# EAGLE board Lumix_driver_2 (EAGLE 5.11)
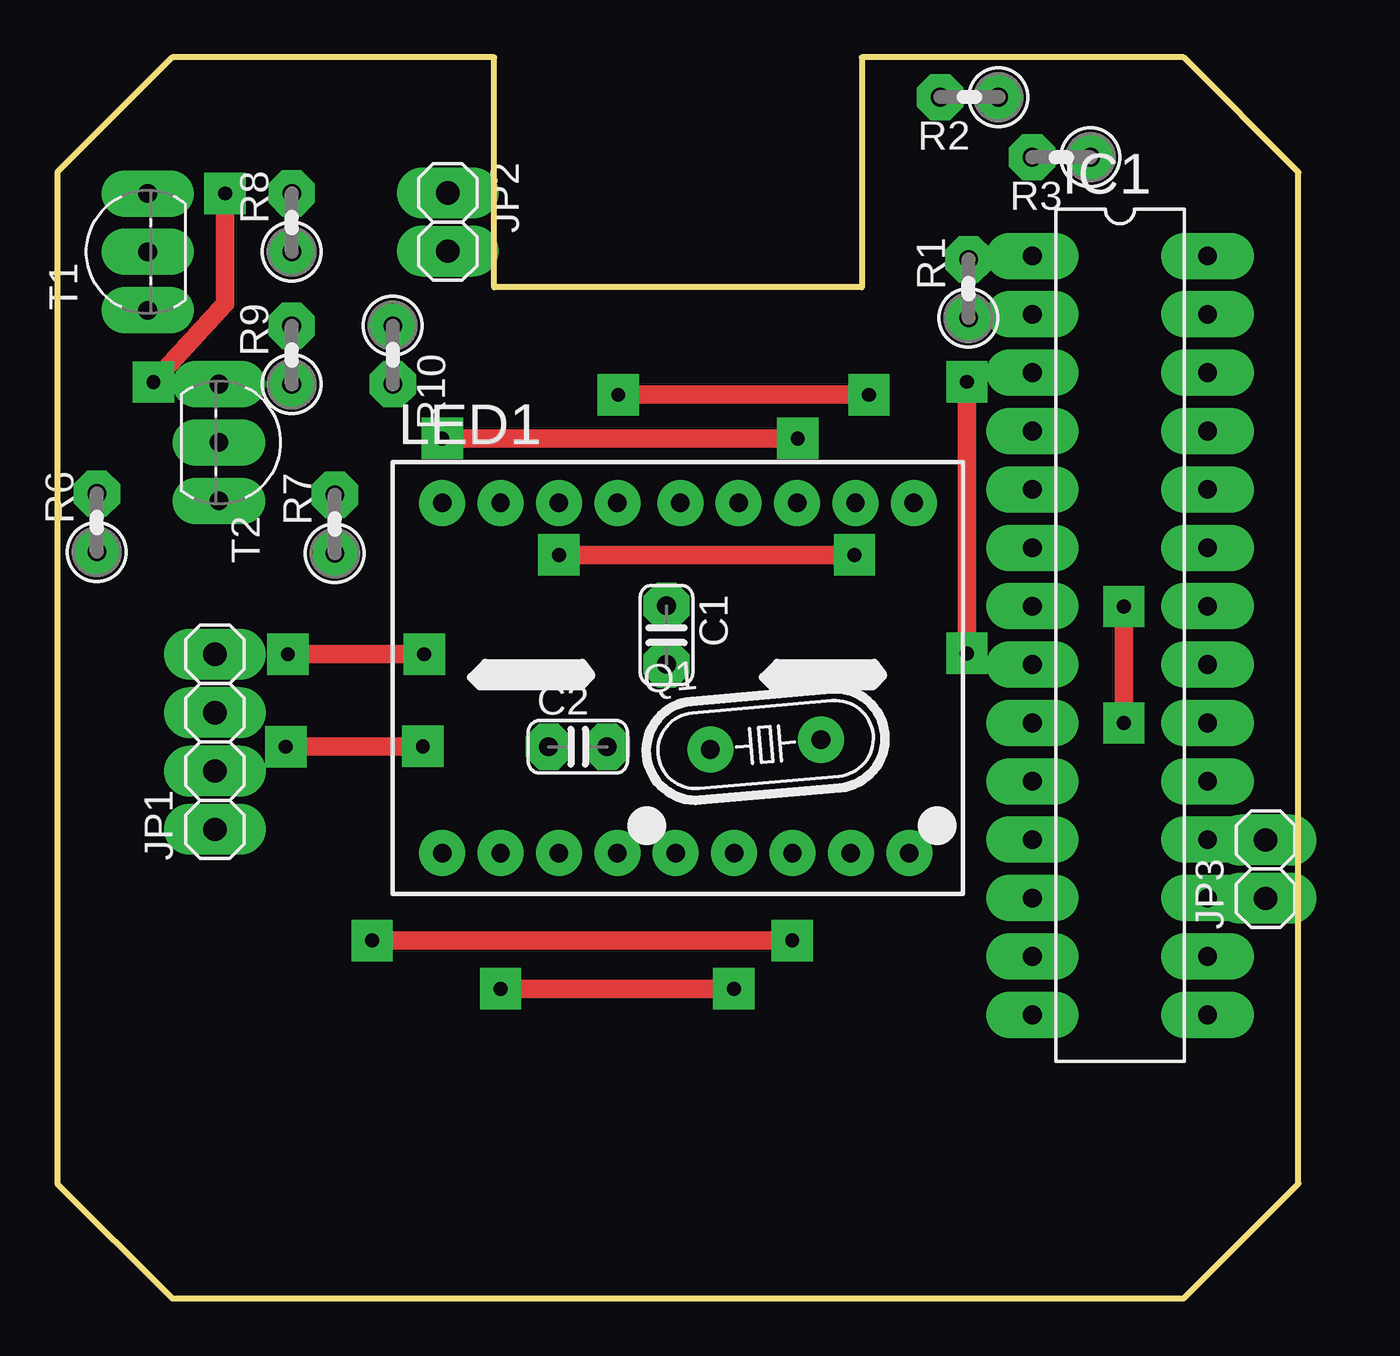
[diagram p0: board, top side]
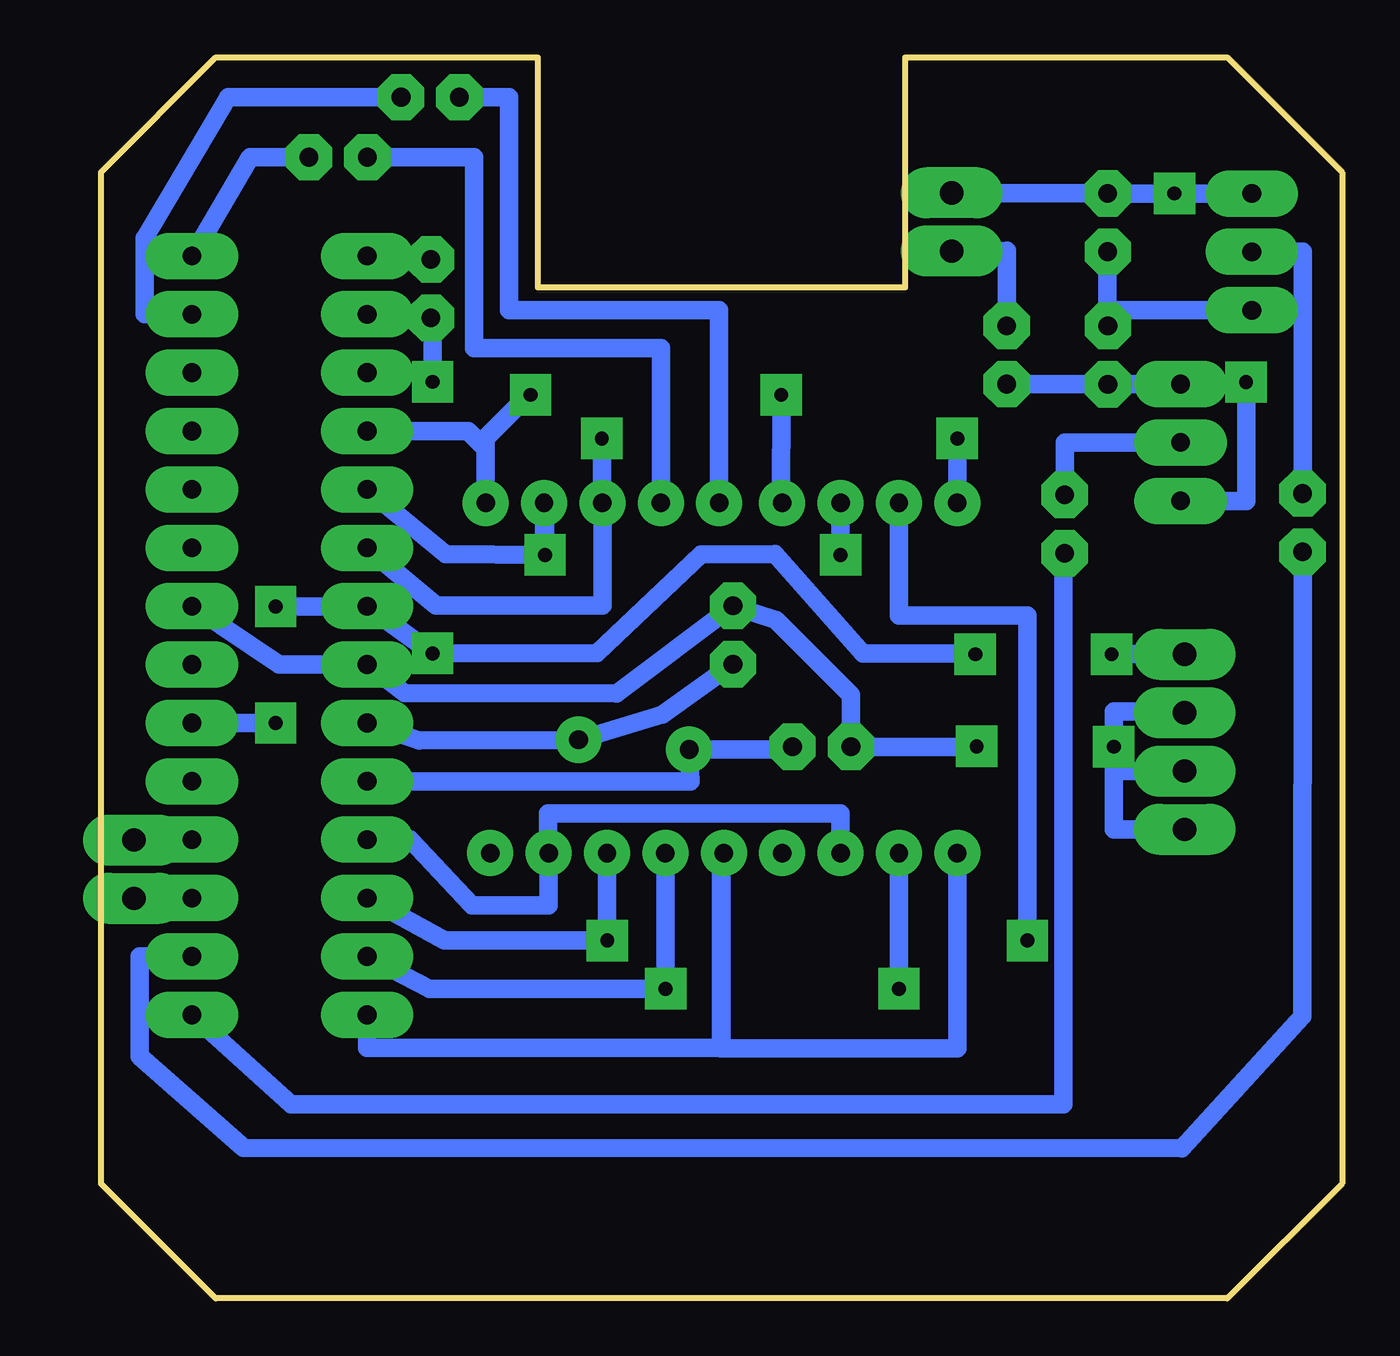
[diagram p1: board, bottom side, seen from below]

Size 54 x 54 mm. Coordinates in mm from the lower left corner, seen from the top.
Outline: 5,0 49,0 54,5 54,49 49,54 35,54 35,44 19,44 19,54 5,54 0,49 0,5 5,0
Copper layers (1*16): Top 0.035mm / dielectric 1.5mm / Bottom 0.035mm
Design rules "hobby": minimum track width 0.8mm, minimum drill 0.8mm, track to track 0.8mm, track to pad 0.8mm, pad to pad 0.45mm, via to via 0.8mm, smd to smd 8mil, copper to edge 10mil, drill to drill 8mil, minimum pad ring 0.6mm, minimum via ring 0.6mm, stop-mask expansion 0mil, vias tented up to drill 0mil, thermal gap 10mil

## Footprints (pad centres in the part's own frame; a part is rotated, then mirrored left to right if it is on the bottom)
C025-024X044 = drill 0.813 octagon: 1 -1.27,0; 2 1.27,0
DIL28-3 = drill 0.813 long: 1 -16.51,-3.81; 2 -13.97,-3.81; 3 -11.43,-3.81; 4 -8.89,-3.81; 5 -6.35,-3.81; 6 -3.81,-3.81; 7 -1.27,-3.81; 8 1.27,-3.81; 9 3.81,-3.81; 10 6.35,-3.81; 11 8.89,-3.81; 12 11.43,-3.81; 13 13.97,-3.81; 14 16.51,-3.81; 15 16.51,3.81; 16 13.97,3.81; 17 11.43,3.81; 18 8.89,3.81; 19 6.35,3.81; 20 3.81,3.81; 21 1.27,3.81; 22 -1.27,3.81; 23 -3.81,3.81; 24 -6.35,3.81; 25 -8.89,3.81; 26 -11.43,3.81; 27 -13.97,3.81; 28 -16.51,3.81
1X04 = drill 1.016 long: 1 -3.81,0; 2 -1.27,0; 3 1.27,0; 4 3.81,0
1X02 = drill 1.016 long: 1 -1.27,0; 2 1.27,0
DA56 = drill 0.8 pad 1.422 round: 1 -10.26,-7.62; 2 -7.72,-7.62; 3 -5.18,-7.62; 4 -2.64,-7.62; 5 -0.1,-7.62; 6 2.44,-7.62; 7 4.98,-7.62; 8 7.52,-7.62; 9 10.06,-7.62; 10 10.26,7.62; 11 7.72,7.62; 12 5.18,7.62; 13 2.64,7.62; 14 0.1,7.62; 15 -2.64,7.62; 16 -5.18,7.62; 17 -7.72,7.62; 18 -10.26,7.62
HC49/S = drill 0.813 round: 1 -2.413,0; 2 2.413,0
0207/2V = drill 0.813 octagon: 1 -1.27,0; 2 1.27,0
TO92-EBC-OVAL = drill 0.813 long: B 0,-1.27; C 2.54,-1.27; E -2.54,-1.27

## Placement (x,y rotation side)
C1  C  [C025-024X044]  26.5,28.87 270 top
C2  C  [C025-024X044]  22.64,24.01 0 top
IC1  MEGA8-P  [DIL28-3]  46.23,28.85 270 top
JP1  JP2  [1X04]  6.85,24.22 90 top
JP2  JP2  [1X02]  16.98,46.84 270 top
JP3  JP2  [1X02]  52.57,18.68 90 top
LED1  DA56-11EWA  [DA56]  27,27 0 top
Q1  16MHz  [HC49/S]  30.81,24.1 5 top
R1  1kR  [0207/2V]  39.64,43.94 90 top
R2  150R  [0207/2V]  39.68,52.27 180 top
R3  150R  [0207/2V]  43.68,49.66 180 top
R6  1kR  [0207/2V]  1.71,33.76 90 top
R7  1kR  [0207/2V]  12.07,33.7 90 top
R8  36kR  [0207/2V]  10.19,46.82 90 top
R9  2.7kR  [0207/2V]  10.19,41.05 90 top
R10  2kR  [0207/2V]  14.59,41.06 270 top
T1  2N2222  [TO92-EBC-OVAL]  2.66,45.54 90 top
T2  2N2222  [TO92-EBC-OVAL]  8.3,37.25 270 top

## Library data of the parts
C1 C2 = rcl
IC1 = avr-7
JP1-JP3 = pinhead
LED1 = display-kingbright; OC_FARNELL: unknown; OC_NEWARK: unknown
Q1 = crystal; OC_FARNELL: 1667008; OC_NEWARK: unknown
R1-R3 R6-R10 = resistor
T1 T2 = adafruit

## Nets
GND: C1.1 C2.1 IC1.8 IC1.22 JP1.1 JP1.2 JP1.3
N$1: JP2.1 R8.2 T1.C T2.C
N$2: R6.2 T1.B
N$3: R7.2 T2.B
N$4: R9.1 R10.2 T2.E
N$5: R8.1 R9.2 T1.E
N$6: JP2.2 R10.1
N$7: IC1.16 R6.1
N$8: IC1.15 R7.1
N$9: IC1.14 LED1.1 LED1.5
N$10: IC1.11 LED1.3 LED1.8
N$11: IC1.12 LED1.7 LED1.17
N$12: IC1.13 LED1.2 LED1.6
N$13: LED1.13 R3.2
N$14: IC1.6 LED1.12 LED1.18
N$15: IC1.5 LED1.11 LED1.16
N$16: IC1.4 LED1.10 LED1.15
N$17: LED1.14 R2.2
N$18: IC1.27 R2.1
N$19: IC1.1 R1.2
N$20: IC1.28 R3.1
N$21: IC1.17 JP3.1
N$22: IC1.18 JP3.2
N$23: C1.2 IC1.9 Q1.2
N$24: C2.2 IC1.10 Q1.1
V+: IC1.7 IC1.20 JP1.4 R1.1

## Tracks (layer width: path | path; a pad name or v marks a point on that pad's centre or on a via)
GND  (via drill 0.6)
  Top 0.813: v15.9,24.02 9.93,24.02 v9.93,24.01
  Bottom 0.813: IC1.22 46.25,27.58 IC1.8 40.78,26.36 31.57,26.33 C1.1 24.64,29.52 21.37,26.25 C2.1 16.1,24.01 v15.9,24.02 | JP1.3 6.85,25.53 9.93,25.53 v9.93,24.01 9.93,22.95 | 9.93,22.95 JP1.2 | JP1.1 9.93,20.41 9.93,22.95
N$1  (via drill 0.6)
  Top 0.813: v4.18,39.87 7.29,43.3 v7.29,48.08
  Bottom 0.813: T1.C v7.29,48.08 R8.2 16.98,48.09 JP2.1 | T2.C 4.18,34.71 v4.18,39.87
N$2
  Bottom 0.813: T1.B 1.71,45.54 R6.2
N$3
  Bottom 0.813: T2.B 12.07,37.25 R7.2
N$4
  Bottom 0.813: T2.E R9.1 R10.2
N$5
  Bottom 0.813: T1.E 10.22,43 10.21,42.89 | 10.21,42.89 R9.2 | R8.1 10.21,45.55 10.21,42.89
N$6
  Bottom 0.813: JP2.2 14.58,45.59 R10.1
N$7
  Bottom 0.813: IC1.16 52.32,14.88 52.32,10.54 47.79,6.55 6.98,6.53 1.73,12.28 R6.1
N$8
  Bottom 0.813: IC1.15 45.73,8.45 12.12,8.46 12.12,32.43 R7.1
N$9
  Bottom 0.813: IC1.14 42.43,10.9 27,10.9 27,19.38 LED1.5 27.02,19.38 27.02,10.89 16.74,10.89 LED1.1
N$10
  Bottom 0.813: IC1.11 40.55,19.96 37.84,17.1 34.52,17.11 LED1.8 34.55,19.38 34.55,21.11 21.82,21.11 LED1.3
N$11  (via drill 0.6)
  Top 0.813: v13.69,15.58 v31.97,15.58
  Bottom 0.813: v31.97,15.58 LED1.7 31.98,15.65 31.92,15.59 39.05,15.59 IC1.12 | v13.69,15.58 13.69,29.71 19.28,29.71 LED1.17
N$12  (via drill 0.6)
  Top 0.813: v19.28,13.47 v29.43,13.47
  Bottom 0.813: LED1.6 v29.43,13.47 39.7,13.47 IC1.13 | v19.28,13.47 LED1.2
N$13
  Bottom 0.813: LED1.13 29.64,41.36 37.77,41.36 37.77,49.66 R3.2
N$14  (via drill 0.6)
  Top 0.813: v16.74,37.42 v32.21,37.42
  Bottom 0.813: v32.21,37.42 32.21,34.62 LED1.12 32.18,30.16 39.43,30.16 IC1.6 | LED1.18 v16.74,37.42
N$15  (via drill 0.6)
  Top 0.813: v21.82,32.35 v34.68,32.35
  Bottom 0.813: LED1.11 | LED1.11 34.72,32.35 39.01,32.38 IC1.5 | LED1.11 34.68,34.62 v34.68,32.35 | v21.82,32.35 LED1.16
N$16  (via drill 0.6)
  Top 0.813: v24.4,39.32 v35.31,39.32
  Bottom 0.813: LED1.15 24.41,34.62 v24.4,39.32 | v35.31,39.32 35.37,39.32 37.26,37.43 37.26,36.97 | 37.26,36.97 LED1.10 | IC1.4 38.03,37.74 37.26,36.97
N$17
  Bottom 0.813: LED1.14 27.1,43 36.25,43 36.25,52.27 R2.2
N$18
  Bottom 0.813: R2.1 48.48,52.27 52.1,46.14 52.1,42.82 IC1.27
N$19
  Bottom 0.813: R1.2 42.42,45.21 IC1.1
N$20
  Bottom 0.813: IC1.28 47.5,49.66 R3.1
N$21
  Bottom 0.813: IC1.17 52.57,17.42 JP3.1
N$22
  Bottom 0.813: IC1.18 52.57,19.96 JP3.2
N$23
  Bottom 0.813: IC1.9 40.16,24.29 Q1.2 29.56,25.41 C1.2
N$24
  Bottom 0.813: C2.2 23.91,23.9 Q1.1 28.36,22.5 IC1.10
V+  (via drill 0.6)
  Top 0.813: v39.57,28.07 v39.57,39.88 | v10.03,28.04 v15.96,28.04 | v46.4,30.11 v46.4,25.04
  Bottom 0.813: v15.96,28.04 15.47,28.07 20.85,28.07 24.68,32.4 27.89,32.37 32.42,28.09 v39.57,28.07 IC1.7 v46.4,30.11 | R1.1 39.57,42.67 v39.57,39.88 | v10.03,28.04 JP1.4 | v46.4,25.04 IC1.20